# Altium PCB PCB1.PcbDoc
Units mm, origin at the board's own origin, x right, y up, seen from the top; angles counter-clockwise.
Board outline 65.28 x 52.07 mm, 2 copper layers (Top Layer, Bottom Layer); 29 components, 25 nets, 126 pads, 14 vias.
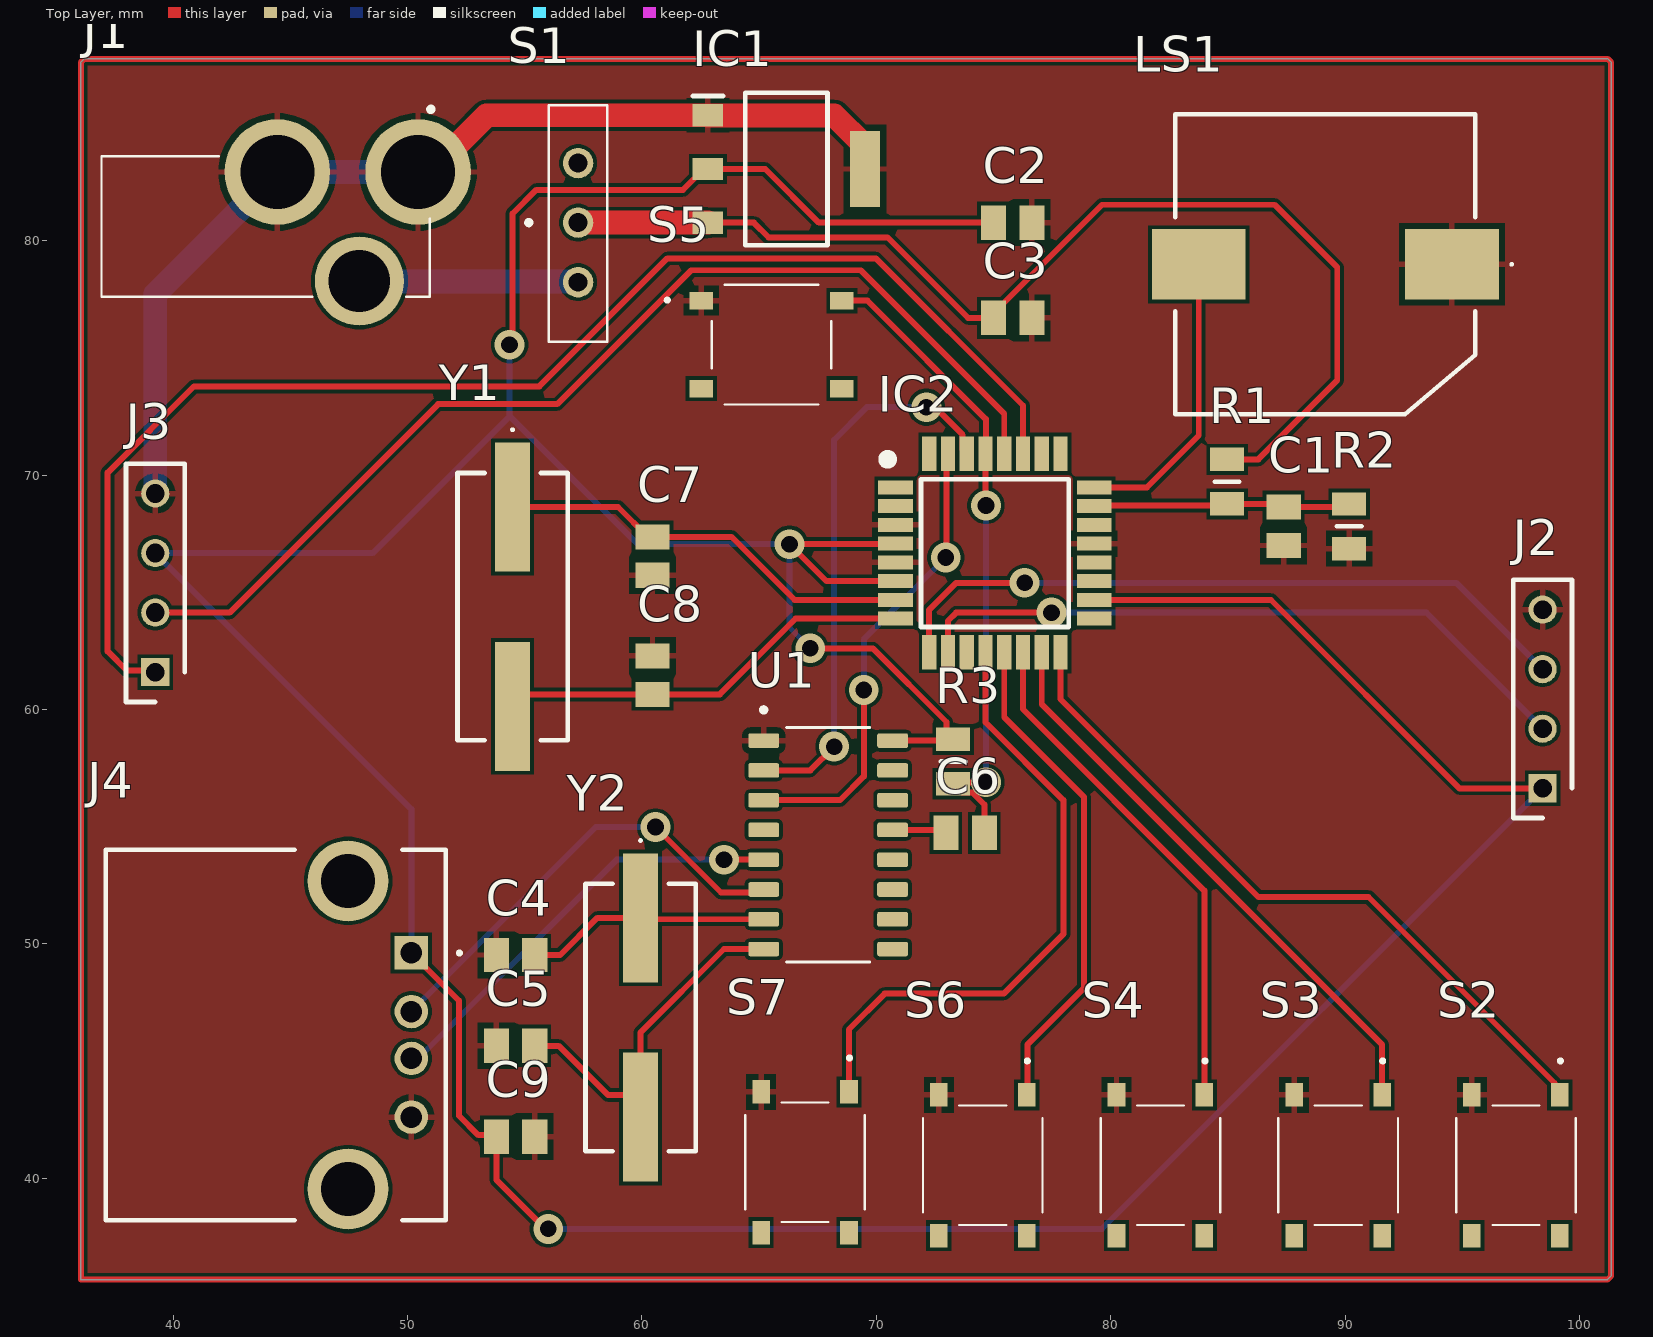
[diagram p0: Top Layer view]
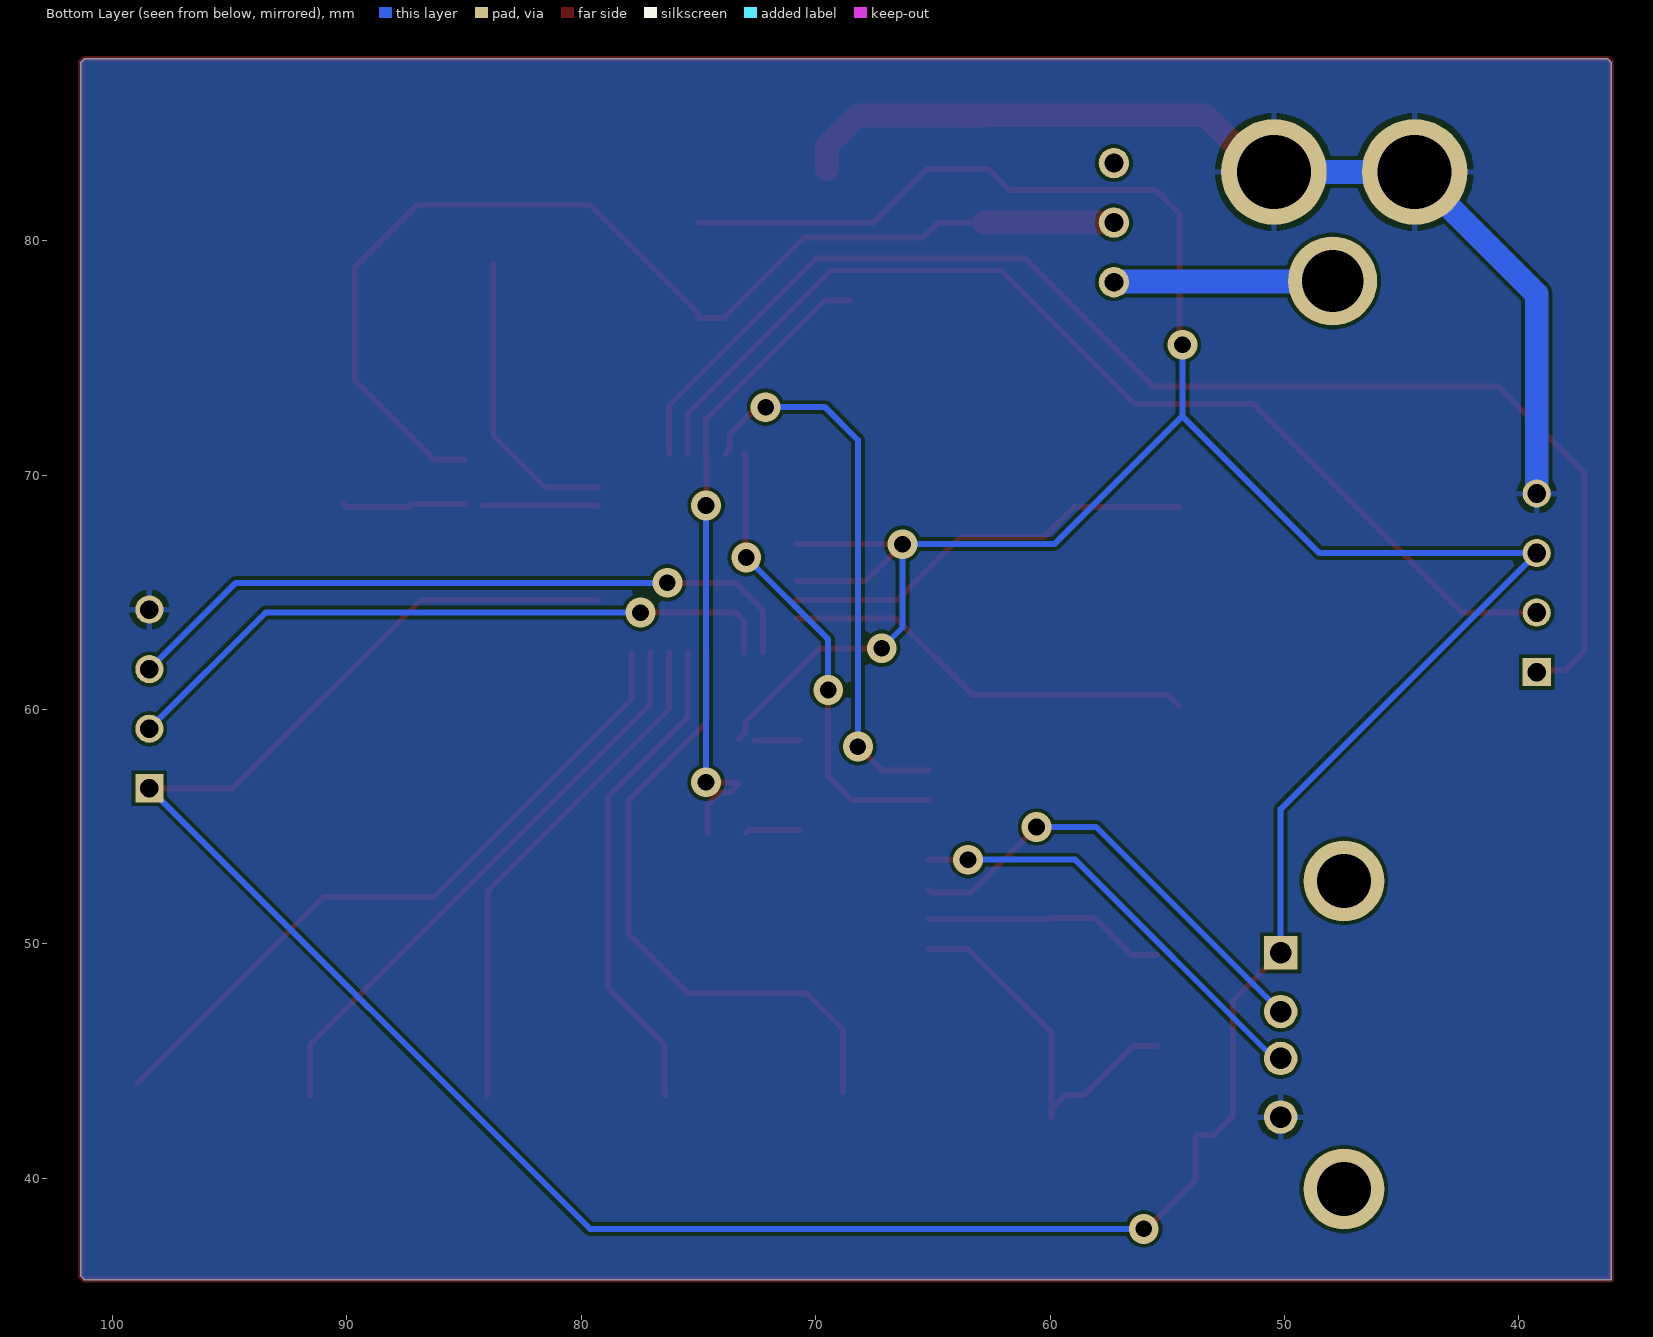
[diagram p1: Bottom Layer view, seen from below]
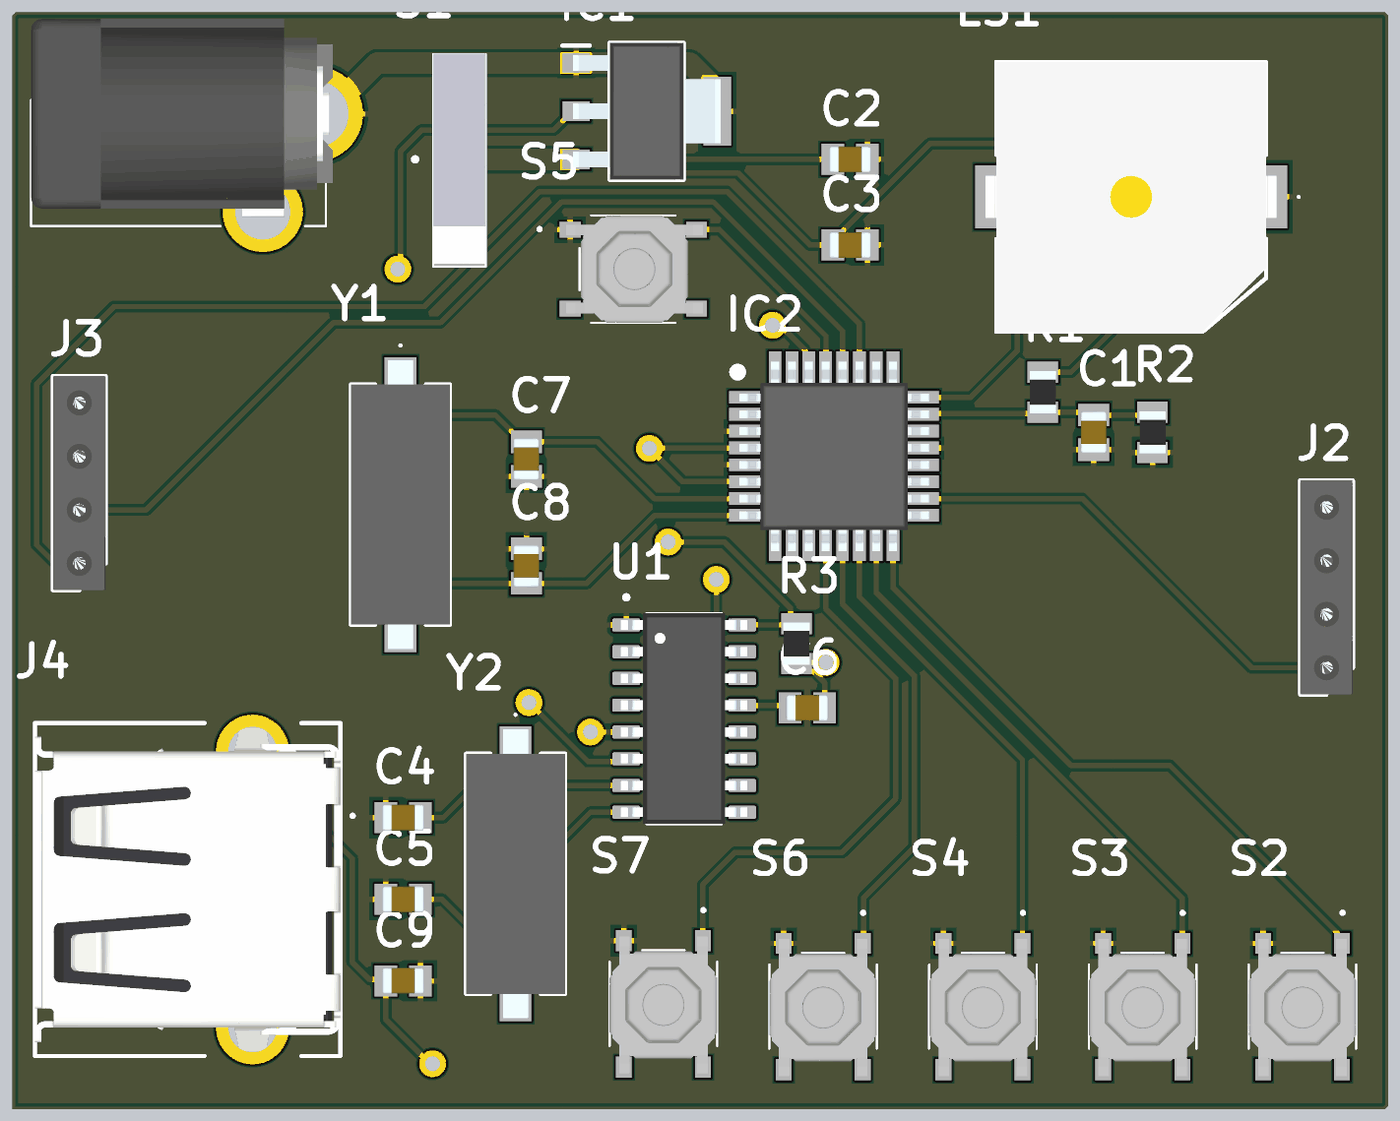
[diagram p2: 3D render of the assembled board from above, using the file's embedded part models]

## Layer stack, top to bottom
Top Solder: solder mask 0.0102, Solder Resist, Dk 3.5
Top Layer: signal copper 0.0356
Dielectric 1: dielectric 0.32, FR-4, Dk 4.8
Bottom Layer: signal copper 0.0356
Bottom Solder: solder mask 0.0102, Solder Resist, Dk 3.5

## Board outline
36.068,35.687 36.068,87.608 36.217,87.757 101.197,87.757 101.346,87.608 101.346,35.836 101.197,35.687

## Design rules (kind name [scope] priority, off if disabled: settings)
Clearance [All] p1: gap=0.152 ignorepadtopadclearanceinfootprint=FALSE
PolygonConnect [All] p1: connectstyle=Relief reliefconductorwidth=0.254 reliefentries=4 polygonreliefangle="90 Angle" airgapwidth=0.254
RoutingVias [All] p1: holewidth=0.711 width=1.27 viastyle="Through Hole" minholewidth=0.711 minwidth=1.27 maxholewidth=0.711 maxwidth=1.27
SolderMaskExpansion [All] p1: expansion=0.102 istentingtop=FALSE
SupplyNets "Schematic Supply Nets" [InNet('GND')] p1: voltage=0.000
Width [All] p1: maxlimit=1.016 minlimit=0.254 preferedwidth=0.254
30 further rules are at their usual default settings.

## Components (designator, comment, footprint, x,y, rotation, side; value= is the part's Value field where it differs from the comment)
C1 "100nF" CAPC2012X130N 87.376,67.818 r90 top
C2 "10uF" CAPC2012X130N 75.819,80.772 r180 top
C3 "10uF" CAPC2012X130N 75.819,76.708 r180 top
C4 "22pF" CAPC2012X130N 54.61,49.53 r0 top
C5 "22pF" CAPC2012X130N 54.61,45.657 r0 top
C6 "100nF" CAPC2012X130N 73.787,54.737 r180 top
C7 "22pF" CAPC2012X130N 60.452,66.548 r90 top
C8 "22pF" CAPC2012X130N 60.452,61.468 r270 top
C9 "100nF" CAPC2012X130N 54.61,41.783 r0 top
IC1 "AMS1117-1.5" SOT229P700X180-4N 66.167,83.058 r0 top
IC2 "x" QFP80P900X900X120-32N 75.057,66.675 r0 top
J1 "DC-005-20A" DC00520A 50.45,82.931 r0 top
J2 "DS1023-1_4S21" RHDR4W60P0X254_1X4_1016X250X840P 98.425,56.642 r90 top
J3 "DS1023-1_4S21" RHDR4W60P0X254_1X4_1016X250X840P 39.243,61.595 r90 top
J4 "1332631" 1332631 50.165,49.617 r270 top
LS1 "buzzer" CT1205SMTTR 89.154,78.994 r0 top
R1 "4.7K" RESC2012X60N 84.963,69.723 r90 top
R2 "10K" RESC2012X60N 90.17,67.818 r90 top
R3 "10K" RESC2012X60N 73.279,57.785 r90 top
S1 "slide switch" 090329001 57.277,80.772 r0 top
S2 "TS-1187A-B-A-B" TS1187ABAB 97.282,40.561 r270 top
S3 "TS-1187A-B-A-B" TS1187ABAB 89.701,40.561 r270 top
S4 "TS-1187A-B-A-B" TS1187ABAB 82.12,40.561 r270 top
S5 "TS-1187A-B-A-B" TS1187ABAB 65.532,75.565 r0 top
S6 "TS-1187A-B-A-B" TS1187ABAB 74.54,40.561 r270 top
S7 "TS-1187A-B-A-B" TS1187ABAB 66.959,40.688 r270 top
U1 "CH340G" SOIC127P600X180-16N 67.945,54.229 r0 top
Y1 "16.0 Mhz" 16000MHz49USMX3050408518pFATF 54.483,64.389 r270 top
Y2 "16.0 Mhz" 16000MHz49USMX3050408518pFATF 59.944,46.863 r270 top

## Footprints (in the part's own frame and the unit in brackets; to place one, negate y for a bottom-side part, rotate by r counter-clockwise, add the part's x,y. Pads: shape width x height; smd on the part's side, far side on the other; paste and mask are expansions set on the pad)
16000MHz49USMX3050408518pFATF [mm]
  rect 5.5x1.5 smd: 1(-4.25,0) 2(4.25,0)
  silkscreen extent -7.6,-2.35 5.7,2.35, body extent -6.85,-2.35 6.85,2.35, height 4.3
1332631 [mm]
  rect 1.431x1.431 hole 0.92: 1(0,0)
  round 1.431 hole 0.92: 2(2.5,0) 3(4.5,0) 4(7,0)
  round 3.45 hole 2.3: MH1(-3.07,-2.7) MH2(10.07,-2.7)
  silkscreen extent -4.4,-13.03 11.4,2.1, body extent -4.4,-13.03 11.39,1.47, height 7.54
090329001 [mm]
  round 1.3 hole 0.8: 1(0,0) 2(0,-2.54) 3(0,2.54)
  silkscreen extent -2.2,-5.08 1.25,5, body extent -1.25,-4.97 1.25,5.03, height 7.8
CAPC2012X130N [mm]
  rect 1.07x1.47 smd: 1(-0.82,0) 2(0.82,0)
  body extent -1,-0.63 1,0.63, height 1.3
CT1205SMTTR [mm]
  rect 4x3 smd: 1(5.4,0) 2(-5.4,0)
  silkscreen extent -6.4,-6.4 8,6.4, body extent -6.9,-6.4 6.9,6.4, height 7.1
DC00520A [mm]
  round 4.5 hole 3.15: 1(0,0) 2(-6,0)
  round 3.8 hole 2.625: 3(-2.5,-4.65)
  silkscreen extent -13.5,-5.33 0.6,2.72, body extent -13.49,-4.89 0.81,4.51, height 11.15
QFP80P900X900X120-32N [mm]
  rect 1.475x0.6 smd: 1(-4.238,2.8) 2(-4.238,2) 3(-4.238,1.2) 4(-4.238,0.4) 5(-4.238,-0.4) 6(-4.238,-1.2) 7(-4.238,-2) 8(-4.238,-2.8) 17(4.238,-2.8) 18(4.238,-2) 19(4.238,-1.2) 20(4.238,-0.4) 21(4.238,0.4) 22(4.238,1.2) 23(4.238,2) 24(4.238,2.8)
  rect 0.6x1.475 smd: 9(-2.8,-4.238) 10(-2,-4.238) 11(-1.2,-4.238) 12(-0.4,-4.238) 13(0.4,-4.238) 14(1.2,-4.238) 15(2,-4.238) 16(2.8,-4.238) 25(2.8,4.238) 26(2,4.238) 27(1.2,4.238) 28(0.4,4.238) 29(-0.4,4.238) 30(-1.2,4.238) 31(-2,4.238) 32(-2.8,4.238)
  silkscreen extent -4.77,-3.15 3.15,4.2, body extent -4.5,-4.5 4.5,4.5, height 1.2
RESC2012X60N [mm]
  rect 1x1.45 smd: 1(-0.95,0) 2(0.95,0)
  silkscreen extent 0,-0.53 0,0.53, body extent -1,-0.63 1,0.63, height 0.6
RHDR4W60P0X254_1X4_1016X250X840P [mm]
  rect 1.2x1.2 hole 0.8: 1(0,0)
  round 1.2 hole 0.8: 2(2.54,0) 3(5.08,0) 4(7.62,0)
  silkscreen extent -1.27,-1.25 8.89,1.25, body extent -1.27,-1.25 8.89,1.25, height 8.4
SOIC127P600X180-16N [mm]
  rrect25% 1.31x0.62 smd: 1(-2.75,4.445) 2(-2.75,3.175) 3(-2.75,1.905) 4(-2.75,0.635) 5(-2.75,-0.635) 6(-2.75,-1.905) 7(-2.75,-3.175) 8(-2.75,-4.445) 9(2.75,-4.445) 10(2.75,-3.175) 11(2.75,-1.905) 12(2.75,-0.635) 13(2.75,0.635) 14(2.75,1.905) 15(2.75,3.175) 16(2.75,4.445)
  silkscreen extent -2.85,-5 1.78,5.85, body extent -3,-5 3,5, height 1.8
SOT229P700X180-4N [mm]
  rect 1.3x0.95 smd: 1(-3.35,2.29) 2(-3.35,0) 3(-3.35,-2.29)
  rect 1.3x3.25 smd: 4(3.35,0)
  silkscreen extent -4,-3.25 1.75,3.25, body extent -3.5,-3.25 3.5,3.25, height 1.8
TS1187ABAB [mm]
  rect 1x0.75 smd: A1(-3,1.875) B1(3,1.875) C1(-3,-1.875) D1(3,-1.875)
  silkscreen extent -4.5,-2.55 2.55,2.55, body extent -3.2,-2.55 3.3,2.55, height 1.5

## Part data
C1 C2 C3: library part 0805Y1000104KET, "Capacitor", Manufacturer_Name=Knowles, Mouser Part Number=843-0805Y1000104KET, Datasheet Link=http://docs-europe.electrocomponents.com/webdocs/119d/0900766b8119d7bc.pdf, Height=1.3mm, Manufacturer_Part_Number=0805Y1000104KET, Mouser Price/Stock=https://www.mouser.co.uk/ProductDetail/Knowles-Syfer/0805Y1000104KET?qs=HXFqYaX1Q2z9U%252BCIptEEYw%3D%3D
C4 C5 C6 C7 C8 C9: library part 0805J050_0223MXE01, "Capacitor", Manufacturer_Name=Knowles, Manufacturer_Part_Number="0805J050 0223MXE01", Datasheet Link=http://docs-europe.electrocomponents.com/webdocs/119d/0900766b8119d7bc.pdf, Height=1.3mm
IC1: "Integrated Circuit", Manufacturer_Name="ams OSRAM", Datasheet Link=http://www.advanced-monolithic.com/pdf/ds1117.pdf, Height=1.8mm, Manufacturer_Part_Number=AMS1117-1.5
IC2: library part ATMEGA328-AU, "Integrated Circuit", Manufacturer_Name=Microchip, Mouser Part Number=556-ATMEGA328-AU, Arrow Part Number=ATMEGA328-AU, Arrow Price/Stock=https://www.arrow.com/en/products/atmega328-au/microchip-technology?region=nac, Datasheet Link=https://ww1.microchip.com/downloads/en/DeviceDoc/ATmega48A-PA-88A-PA-168A-PA-328-P-DS-DS40002061B.pdf, Height=1.2mm, Manufacturer_Part_Number=ATMEGA328-AU, Mouser Price/Stock=https://www.mouser.co.uk/ProductDetail/Microchip-Technology/ATMEGA328-AU?qs=lwdSMh1%2FoYJRHuGBjWz9Pg%3D%3D
J1: "Connector", Manufacturer_Name="Korean Hroparts Elec", Datasheet Link=https://datasheet.lcsc.com/szlcsc/Korean-Hroparts-Elec-DC-005-20A_C130239.pdf, Height=11mm, Manufacturer_Part_Number=DC-005-20A
J2 J3: "Connector", Manufacturer_Name=Connfly, Manufacturer_Part_Number=DS1023-1*4S21, Datasheet Link=https://www.tme.eu/Document/951e887d7e645db1a4e49e0834499c9b/zl262-sg.pdf, Height=8.4mm
J4: "Connector", Manufacturer_Name="Phoenix Contact", Datasheet Link=http://www.phoenixcontact.com/de/produkte/1332631, Height=7.69mm, Manufacturer_Part_Number=1332631
LS1: library part CT-1205-SMT-TR, "Loudspeaker or Buzzer", Manufacturer_Name="Same Sky", Mouser Part Number=490-CT-1205-SMT-TR, Arrow Part Number=CT-1205-SMT-TR, Arrow Price/Stock=https://www.arrow.com/en/products/ct-1205-smt-tr/cui-devices?region=nac, Datasheet Link=https://www.sameskydevices.com/product/resource/ct-1205-smt-tr.pdf, Height=7.6mm, Manufacturer_Part_Number=CT-1205-SMT-TR, Mouser Price/Stock=https://www.mouser.co.uk/ProductDetail/CUI-Devices/CT-1205-SMT-TR?qs=WyjlAZoYn53yMdK6PtX%2FVw%3D%3D
R1 R2 R3: library part CRCW080510K0FKEAHP, "Resistor", Manufacturer_Name=Vishay, Mouser Part Number=71-CRCW080510K0FKEAH, Arrow Part Number=CRCW080510K0FKEAHP, Arrow Price/Stock=https://www.arrow.com/en/products/crcw080510k0fkeahp/vishay?utm_currency=USD&region=europe, Datasheet Link=https://componentsearchengine.com/Datasheets/1/CRCW08051R00FKEAHP.pdf, Height=0.6mm, Manufacturer_Part_Number=CRCW080510K0FKEAHP, Mouser Price/Stock=https://www.mouser.co.uk/ProductDetail/Vishay-Dale/CRCW080510K0FKEAHP?qs=FlFvgi4rxBybVOW6oiRQjA%3D%3D
S1: library part 09.03290.01, "Switch", Manufacturer_Name=EAO, Mouser Part Number=123-09.03290.01, Datasheet Link=https://www.mouser.co.uk/datasheet/2/628/EAO_1K2%20data%20sheet-1216079.pdf, Height=7.9mm, Manufacturer_Part_Number=09.03290.01, Mouser Price/Stock=https://www.mouser.co.uk/ProductDetail/EAO/09.03290.01?qs=2pKMaj72wiFtSlc%252BiwXuGQ%3D%3D
S2 S3 S4 S5 S6 S7: "Switch", Manufacturer_Name="XKB Connectivity", Datasheet Link=http://www.helloxkb.com/public/images/pdf/TS-1187A-X-X-X.pdf, Height=4.05mm, Manufacturer_Part_Number=TS-1187A-B-A-B
U1: "USB Interface Integrated Circuit", Package=None, Availability="Not in stock", Check_prices=https://www.snapeda.com/parts/Ch340G/WCH/view-part/?ref=eda, MF=WCH, MP=Ch340G, Price=None, SnapEDA_Link=https://www.snapeda.com/parts/Ch340G/WCH/view-part/?ref=snap
Y1 Y2: library part 16.000MHz_49USMX_30_50_-40+85_18pF_ATF, "Crystal or Oscillator", Manufacturer_Name=EUROQUARTZ, Manufacturer_Part_Number="16.000MHz 49USMX/30/50/-40+85/18pF/ATF", Datasheet Link=https://www.farnell.com/datasheets/75362.pdf, Height=4.2mm

## Via types
v1: diameter 1.27, hole 0.711, Top Layer to Bottom Layer, 14 vias

## Nets (pads, with @x,y where several pads share a name; then routed paths per layer and width w, separated by ;. In a path a pad name is that pad's centre, name@x,y a point inside that pad or via, vN(x,y) a via of type N, cw(c..) or ccw(c..) an arc to the next point about the centre after c; other vN are vias at no path point)
adc: C1.2 IC2.23 R1.1 R2.2 | length 10.2
  Top Layer w0.254: IC2.23 79.327,68.707 84.201,68.707 ; R1.1 87.241,68.773 C1.2 90.04,68.638 R2.2
Dn: J4.2 U1.6 | length 19.5
  Top Layer w0.254: v1(60.579,54.991) 63.373,52.197 65.068,52.197 U1.6
  Bottom Layer w0.254: J4.2 58.039,54.991 v1(60.579,54.991)
Dp: J4.3 U1.5 | length 18.5
  Top Layer w0.254: v1(63.5,53.594) U1.5
  Bottom Layer w0.254: J4.3 50.451,45.117 58.928,53.594 v1(63.5,53.594)
DTR: C6.1 IC2.29 R3.1 S5.B1 | length 28.1
  Top Layer w0.254: S5.B1 69.626,77.44 74.676,72.39 74.676,70.932 IC2.29 74.657,68.853 74.676,68.834 v1(74.676,68.707) ; C6.1 74.607,55.949 74.094,56.462 73.652,56.462 R3.1 73.34,56.896 v1(74.676,56.896)
  Bottom Layer w0.254: v1(74.676,56.896) v1(74.676,68.707)
Echo: IC2.9 J2.3 | length 30
  Top Layer w0.254: IC2.9 72.257,64.256 73.406,65.405 v1(76.327,65.405)
  Bottom Layer w0.254: v1(76.327,65.405) 94.742,65.405 J2.3
GND: C1.1 C2.1 C3.1 C4.1 C5.1 C7.1 C8.1 C9.2 IC1.1 IC1.4 IC2.3 IC2.5 IC2.21 J1.1 J1.2 J2.4 J3.4 J4.4 LS1.1 R2.1 S2.C1 S3.C1 S4.C1 S5.A1 S6.C1 S7.C1 U1.1 | length 43.5
  Top Layer w1.016: J1.1 50.953,82.931 53.37,85.348 IC1.1 62.821,85.344 68.206,85.344 69.517,84.033 IC1.4
  Bottom Layer w1.016: J3.4 39.243,77.724 J1.2 J1.1
NetC4_2: C4.2 U1.7 Y2.1 | length 10.4
  Top Layer w0.254: C4.2 56.515,49.53 58.098,51.113 Y2.1 60.003,51.054 U1.7
NetC5_2: C5.2 U1.8 Y2.2 | length 16
  Top Layer w0.254: C5.2 56.451,45.657 58.547,43.561 59.321,43.561 Y2.2@59.944,42.938 ; Y2.2 Y2.2@59.944,42.938 ; U1.8 63.5,49.784 59.944,46.228 Y2.2@59.944,42.938
NetC6_2: C6.2 U1.13 | length 2.3
  Top Layer w0.254: U1.13 72.84,54.864 C6.2
NetC7_2: C7.2 IC2.7 Y1.1 | length 18
  Top Layer w0.254: Y1.1 58.981,68.639 60.252,67.368 C7.2 63.823,67.368 66.516,64.675 IC2.7
NetC8_2: C8.2 IC2.8 Y1.2 | length 17.9
  Top Layer w0.254: Y1.2 54.992,60.648 C8.2 63.327,60.648 66.554,63.875 IC2.8
NetIC2_12: IC2.12 S7.A1 | length 26.9
  Top Layer w0.254: S7.A1 68.834,46.355 70.358,47.879 75.438,47.879 77.978,50.419 77.978,56.134 74.657,59.455 IC2.12
NetIC2_13: IC2.13 S6.A1 | length 21.3
  Top Layer w0.254: IC2.13 75.457,59.671 78.867,56.261 78.867,48.133 76.454,45.72 76.454,43.6 S6.A1
NetIC2_14: IC2.14 S4.A1 | length 22.1
  Top Layer w0.254: IC2.14 76.257,60.014 83.995,52.276 S4.A1
NetIC2_15: IC2.15 S3.A1 | length 24.9
  Top Layer w0.254: IC2.15 77.057,60.226 91.576,45.707 S3.A1
NetIC2_16: IC2.16 S2.A1 | length 29.9
  Top Layer w0.254: IC2.16 77.857,60.446 86.296,52.006 90.995,52.006 98.933,44.069
NetIC2_24: IC2.24 LS1.2 | length 12.7
  Top Layer w0.254: IC2.24 81.54,69.475 83.754,71.689 LS1.2
NetJ1_3: J1.3 S1.2 | length 9.3
  Bottom Layer w1.016: J1.3 47.975,78.256 57.253,78.256 S1.2
Rx: IC2.31 U1.3 | length 20
  Top Layer w0.254: U1.3 68.453,56.134 69.469,57.15 v1(69.469,60.833) ; v1(72.962,66.484) 73.025,66.548 73,66.573 73,70.856 IC2.31
  Bottom Layer w0.254: v1(69.469,60.833) 69.469,62.992 v1(72.962,66.484)
SCL: IC2.28 J3.2 | length 46.5
  Top Layer w0.254: J3.2 42.418,64.135 51.308,73.025 56.388,73.025 62.103,78.74 69.342,78.74 75.457,72.625 IC2.28
SDA: IC2.27 J3.1 | length 57.5
  Top Layer w0.254: J3.1 39.173,61.665 38.03,61.665 37.211,62.484 37.211,70.104 40.894,73.787 55.626,73.787 61.087,79.248 69.977,79.248 76.257,72.968 IC2.27
Trig: IC2.10 J2.2 | length 28.9
  Top Layer w0.254: IC2.10 73.057,63.786 73.406,64.135 v1(77.47,64.135)
  Bottom Layer w0.254: v1(77.47,64.135) 93.472,64.135 J2.2
Tx: IC2.30 U1.2 | length 23.9
  Top Layer w0.254: U1.2 67.183,57.404 v1(68.199,58.42) ; v1(72.136,72.898) 72.33,72.704 72.699,72.704 73.684,71.719 73.684,71.086 IC2.30
  Bottom Layer w0.254: v1(68.199,58.42) 68.199,71.501 69.596,72.898 v1(72.136,72.898)
Vcc_5: C2.2 C9.1 IC1.2 IC2.4 IC2.6 IC2.18 J2.1 J3.3 J4.1 R3.2 U1.16 | length 196
  Top Layer w0.254: J4.1 52.197,47.585 52.197,42.672 53.023,41.846 53.727,41.846 C9.1 53.79,39.936 55.88,37.846 v1(56.007,37.846) ; v1(54.356,75.565) 54.483,75.692 54.483,81.153 55.499,82.169 61.753,82.169 62.642,83.058 IC1.2 65.262,83.058 67.548,80.772 C2.2 ; v1(67.183,62.611) 69.85,62.611 72.994,59.467 72.994,59.02 R3.2 ; U1.16 R3.2@72.607,58.674 ; IC2.6 67.875,65.475 v1(66.294,67.056) 66.303,67.065 70.81,67.065 IC2.4 ; IC2.18 86.836,64.675 94.869,56.642 J2.1
  Bottom Layer w0.254: J4.1 50.165,55.753 J3.3 48.514,66.675 54.356,72.517 ; v1(54.356,75.565) 54.356,72.517 ; v1(56.007,37.846) 79.629,37.846 J2.1 ; v1(67.183,62.611) 66.294,63.5 v1(66.294,67.056) 59.817,67.056 54.356,72.517
Vcc_12: C3.2 IC1.3 R1.2 S1.1 | length 48.2
  Top Layer w0.254: IC1.3 64.774,80.768 65.405,80.137 70.485,80.137 73.914,76.708 C3.2 74.999,76.908 79.625,81.534 86.995,81.534 89.662,78.867 89.662,74.041 86.294,70.673 R1.2
  Top Layer w1.016: S1.1 57.279,80.77 62.815,80.77 IC1.3
pads on no net: IC2.1 IC2.2 IC2.11 IC2.17 IC2.19 IC2.20 IC2.22 IC2.25 IC2.26 IC2.32 J4.MH1 J4.MH2 S1.3 S2.B1 S2.D1 S3.B1 S3.D1 S4.B1 S4.D1 S5.C1 S5.D1 S6.B1 S6.D1 S7.B1 S7.D1 U1.4 U1.9 U1.10 U1.11 U1.12 U1.14 U1.15
copper on no net: | length 234.4
  Top Layer w0.254: 36.068,35.687 101.197,35.687 101.346,35.836 101.346,50.927 101.346,51.943 101.346,87.608 101.197,87.757 36.217,87.757 36.068,87.608 36.068,36.957 36.068,35.687

## Polygon pours and split planes (outlines as drawn)
GND on Bottom Layer "GND_L02_P001" (solid, pour order 1): 36.195,87.757 101.219,87.757 101.346,87.63 101.346,35.814 101.219,35.687 36.068,35.687 36.068,87.63
GND on Top Layer "GND_L01_P004" (solid, pour order 4): 36.068,35.687 101.197,35.687 101.346,35.836 101.346,87.63 101.324,87.63 101.197,87.757 36.217,87.757 36.068,87.608